# Altium PCB Motor Controller.PcbDoc (part 2 of 2)
Units mm, origin at the board's own origin, x right, y up, seen from the top; angles counter-clockwise.
Board outline 150 x 105 mm, 4 copper layers (Top Layer, Layer 1, Layer 2, Bottom Layer), stack 1.64 mm thick; 87 components, 29 nets, 264 pads, 470 vias.
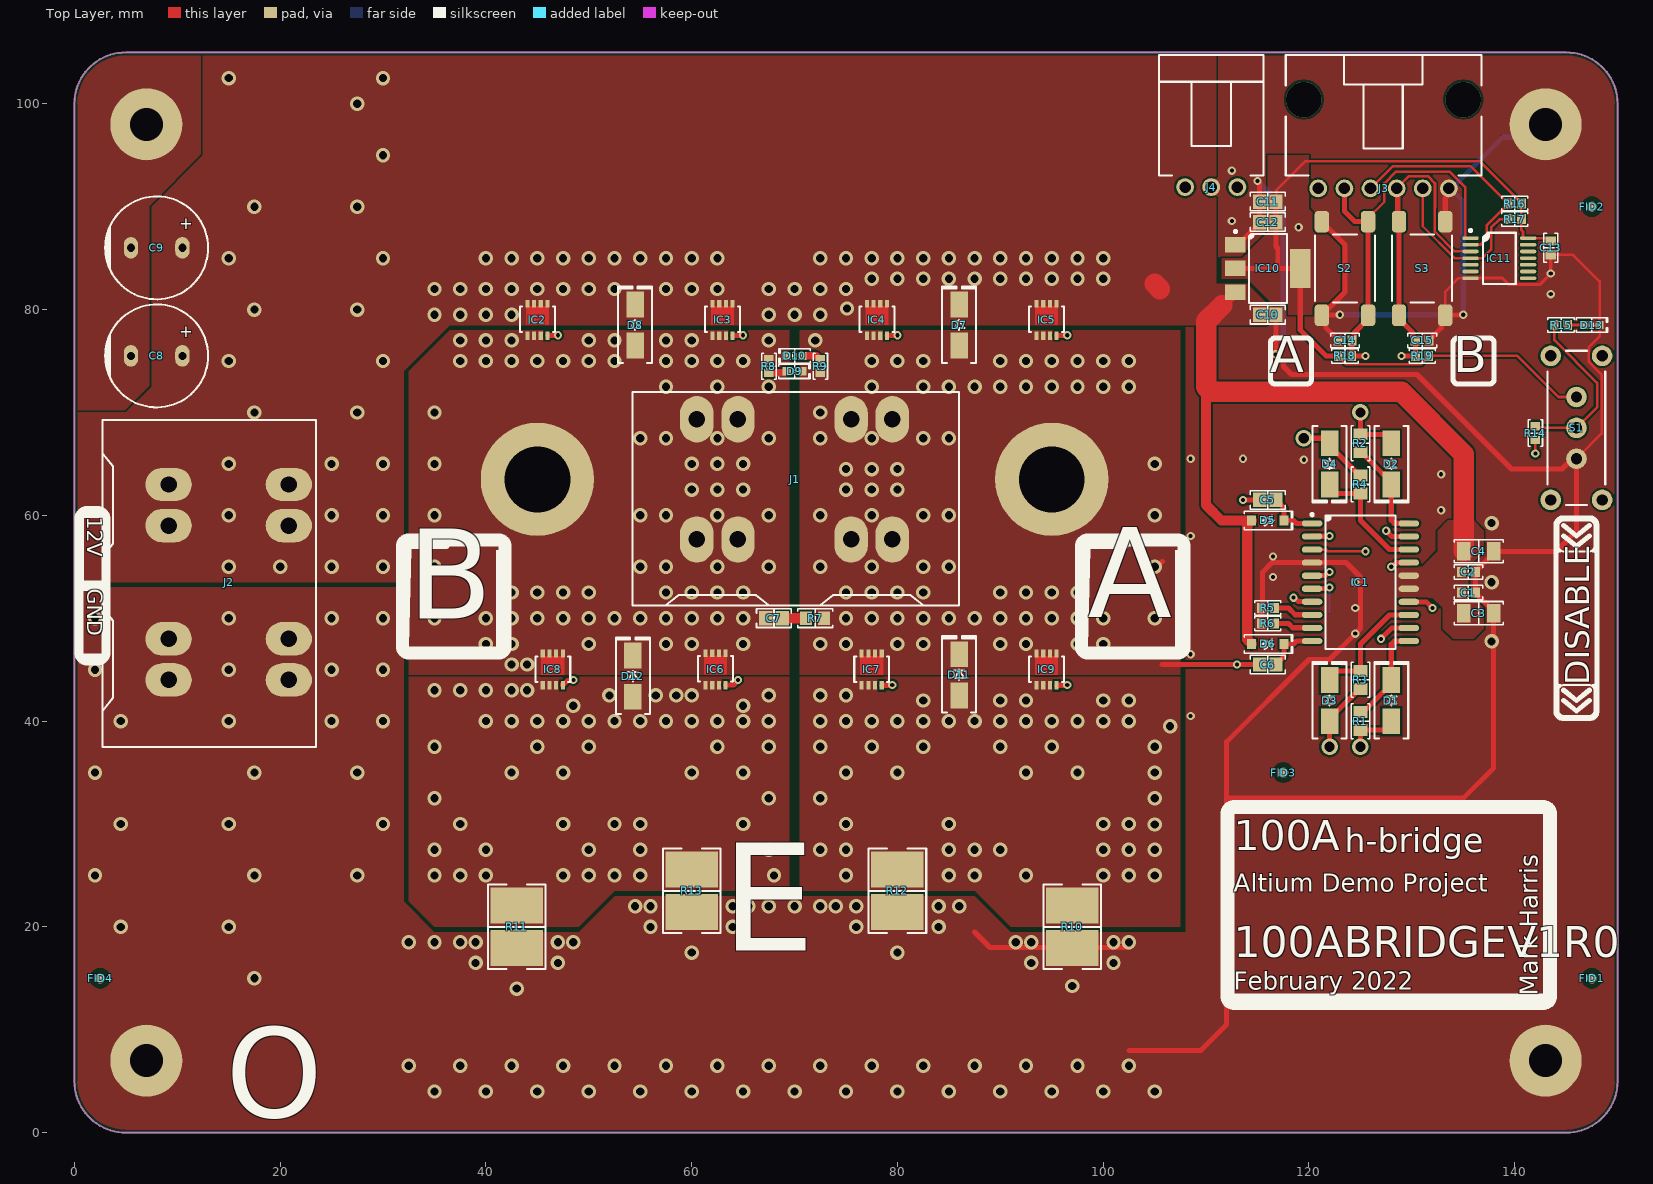
[diagram p0: Top Layer view]

## Via types
v1: diameter 1.4, hole 0.8, Top Layer to Bottom Layer, tented both sides, 420 vias
v2: diameter 0.8, hole 0.4, Top Layer to Bottom Layer, tented both sides, 44 vias
v3: diameter 1.6, hole 1, Top Layer to Bottom Layer, tented both sides, 4 vias
v4: diameter 3.45, hole 3.45, Top Layer to Bottom Layer, tented both sides, 2 vias

## Nets (pads, with @x,y where several pads share a name; then routed paths per layer and width w, separated by ;. In a path a pad name is that pad's centre, name@x,y a point inside that pad or via, vN(x,y) a via of type N, cw(c..) or ccw(c..) an arc to the next point about the centre after c; other vN are vias at no path point) (continued)
HIGHSRC_A: (continued)
  other v1: 72.5,47.5 75,47.5 80,47.5 82.5,47.5 90,47.5 92.5,47.5 97.5,47.5 100,47.5 75,50 77.5,50 80,50 82.5,50 85,50 87.5,50 90,50 92.5,50 95,50 97.5,50 100,50 105,50 75,52.5 77.5,52.5 80,52.5 82.5,52.5 90,52.5 92.5,52.5 95,52.5 97.5,52.5 72.5,55 77.5,55 82.5,55 85,55 72.5,60 77.5,60 82.5,60 85,60 105,60 75,62.5 77.5,62.5 80,62.5 75,64.5 77.5,64.5 80,64.5 105,65 72.5,67.5 77.5,67.5 82.5,67.5 85,67.5 72.5,70 77.5,72.5 82.5,72.5 85,72.5 87.5,72.5 90,72.5 92.5,72.5 95,72.5 97.5,72.5 100,72.5 102.5,72.5 77.5,75 80,75 82.5,75 90,75 92.5,75 95,75 97.5,75 100,75 102.5,75 72,77
HIGHSRC_B: C5.1 C7.2 D8.1 D10.2 D12.2 IC1.19 IC2.S IC3.S IC6.D IC8.D J1.1 pad.B R8.2 TP2.1 TP14.1 | length 78.5
  Top Layer w0.5: v2(113.6,61.5) C5.1 ; v2(127.5,58.5) 128.055,57.945 IC1.19
  Layer 1 w0.5: J1.1@64.5,69.34 64.5,68.715 67.215,66 88,66 92.5,70.5 109.5,70.5 112.75,67.25 112.75,62.35 v2(113.6,61.5) 124.5,61.5 v2(127.5,58.5)
  other v1: 42.5,45.5 44,45.5 40,47.5 42.5,47.5 50,47.5 57.5,47.5 60,47.5 65,47.5 35,50 40,50 42.5,50 45,50 47.5,50 50,50 52.5,50 55,50 57.5,50 60,50 62.5,50 65,50 42.5,52.5 45,52.5 47.5,52.5 50,52.5 57.5,52.5 60,52.5 62.5,52.5 65,52.5 35,55 55,55 57.5,55 62.5,55 67.5,55 35,60 55,60 57.5,60 62.5,60 67.5,60 60,62.5 62.5,62.5 65,62.5 35,65 60,65 62.5,65 65,65 55,67.5 57.5,67.5 62.5,67.5 67.5,67.5 35,70 57.5,72.5 62.5,72.5 67.5,72.5 37.5,75 40,75 42.5,75 45,75 47.5,75 50,75 52.5,75 57.5,75 60,75 62.5,75 65,75 37.5,77 40,77 42.5,77 50,77 52.5,77 57.5,77 60,77 67.5,77
LEDPWR: D13.1 R15.2 | length 1.6
  Top Layer w0.25: R15.2 D13.1
LOWIN_A: IC1.6 IC11.2 J3.3 R16.1 TP8.1 | length 70.8
  Top Layer w0.25: J3.3@126.23,91.777 126.23,92.027 128.153,93.95 135.7,93.95 139,90.65 139.05,90.65 139.35,90.35 R16.1 139.35,90.25 137.263,88.163 137.263,86.909 136.673,86.319 135.72,86.319 IC11.2
  Top Layer w0.5: IC1.6 120.319,52.884 121.803,52.884 121.919,53 v2(122,53)
  Layer 2 w0.5: v2(122,53) 121.15,53.85 121.15,55.65 130.5,65 130.5,87.507 J3.3@126.23,91.777
  Bottom Layer w0.2: TP8.1 v2(122,53)
LOWIN_B: IC1.5 IC11.4 J3.5 R17.1 TP13.1 | length 59.1
  Top Layer w0.25: J3.5 131.06,88.099 134.159,85 136.875,85 137.713,85.837 137.713,87.963 138.55,88.8 R17.1
  Top Layer w0.5: IC1.5 120.319,54.154 121.573,54.154 121.919,54.5 v2(122,54.5)
  Layer 2 w0.5: v2(122,54.5) 122,55.5 131.31,64.81 J3.5@131.31,91.777
LOWOUT_A: D3.2 IC1.13 R3.1 | length 12
  Top Layer w0.5: D3.2 122,44.275 122.6,44.875 R3.1 125,47.5 127.825,50.325 IC1.13
LOWOUT_B: D4.2 IC1.18 R4.1 | length 12
  Top Layer w0.5: D4.2 122,62.725 122.6,62.125 R4.1 125,59.5 127.825,56.675 IC1.18
LOWSRC_A: D11.1 IC1.14 IC7.S IC9.S J4.3 R10.1 R12.1 TP12.1 | length 92.9
  Top Layer w0.5: IC1.14 131.405,51.595 v2(132,51)
  Layer 1 w0.5: J4.3@113.04,91.777 121.25,83.567 121.25,76.75 132,66 v2(132,51)
  Layer 2 w0.5: v1(105,29.95) 121.198,29.95 132,40.752 v2(132,51)
  other v1: 75,25 85,25 87.5,25 92.5,25 100,25 102.5,25 105,25 72.5,27.5 75,27.5 85,27.5 87.5,27.5 90,27.5 100,27.5 102.5,27.5 105,27.5 75,30 85,30 100,30 102.5,30 72.5,32.5 105,32.5 75,35 80,35 92.5,35 97.5,35 105,35 72.5,37.5 77.5,37.5 82.5,37.5 90,37.5 95,37.5 105,37.5 106.5,39.5 72.5,40 75,40 77.5,40 80,40 82.5,40 85,40 87.5,40 90,40 92.5,40 95,40 97.5,40 100,40 102.5,40 82.5,42 90,42 92.5,42 100,42 102.5,42 72.5,42.5 75,42.5
LOWSRC_B: D12.1 IC1.17 IC6.S IC8.S J4.1 R11.2 R13.2 TP15.1 | length 133.9
  Top Layer w0.5: v2(128,55) 128.081,55 128.467,55.386 129.681,55.386 IC1.17
  Layer 1 w0.5: J4.1@107.96,91.777 111.987,87.75 116,87.75 120.55,83.2 120.55,76.45 129.25,67.75 129.25,56.25 v2(128,55)
  Layer 2 w0.75: v1(68,25) 68.031,25 69.306,23.725 88.028,23.725 95.578,31.275 103.028,31.275 103.078,31.225 121.306,31.225 128,37.919 v2(128,55)
  other v1: 35,25 37.5,25 40,25 47.5,25 50,25 52.5,25 55,25 65,25 35,27.5 40,27.5 50,27.5 55,27.5 65,27.5 67.5,27.5 37.5,30 47.5,30 52.5,30 55,30 65,30 35,32.5 67.5,32.5 42.5,35 47.5,35 60,35 65,35 35,37.5 45,37.5 50,37.5 62.5,37.5 67.5,37.5 40,40 42.5,40 45,40 47.5,40 50,40 52.5,40 55,40 57.5,40 60,40 62.5,40 65,40 67.5,40 48.5,41.5 65,41.5 52,42.5 56.5,42.5 58.5,42.5 60,42.5 67.5,42.5 35,43 37.5,43 40,43 42.5,43 44,43
NetC7_1: C7.1 R7.2 | length 2.3
  Top Layer w1: C7.1 R7.2
NetD9_1: D9.1 R8.1 | length 1.8
  Top Layer w0.75: R8.1 69.1,73.85 D9.1
NetD10_1: D10.1 R9.2 | length 1.9
  Top Layer w0.75: D10.1 72.1,75.5 72.45,75.15 R9.2
NetIC1_8: IC1.8 R5.2 | length 3.9
  Top Layer w0.5: R5.2 118,51 118.656,50.344 120.281,50.344 IC1.8
NetIC1_9: IC1.9 R6.2 | length 3.8
  Top Layer w0.5: R6.2 118,49.5 118.426,49.074 120.281,49.074 IC1.9
NetR14_1: R14.1 R15.1 S1.2 | length 16.6
  Top Layer w0.25: R14.1 142.15,68.5 S1.2 148,70.5 148,72.874 143.85,77.024 R15.1
pads on no net: FID1.F FID2.F FID3.F FID4.F IC11.5 IC11.6 IC11.8 IC11.9 IC11.10 IC11.11 IC11.12 IC11.13 S1.M
copper on no net:
  other v4: 119.5,100.417 135,100.417

## Polygon pours and split planes (outlines as drawn)
GND on Top Layer "NONET_L-01_P-001" (solid, remove dead copper, pour order 4): 32,53 0,53 0,0 115,0 115,19.5 91,19.5 87.5,23 52.5,23 49,19.5 35,19.5 32,22.5
GND on Top Layer "NONET_L-01_P-001" (solid, remove dead copper, pour order 19): 108,0 108,105 150,105 150,0
12V on Top Layer "NONET_L-01_P-001" (solid, remove dead copper, pour order 15): 128.5,55 128.5,52 132,52 133,51 133,49 134,48 136,48 137,49 137,51 135.5,52.5 135.5,55 137,56.5 137,58.5 136,59.5 133.5,59.5 132.5,58.5 132.5,56.5 131,55
3V3 on Top Layer "NONET_L-01_P-001" (solid, remove dead copper, pour order 14): 111.5,83 111.5,85 113.5,85 116,87.5 116,95 120,95 120,89.8 123.5,86.3 123.5,81.7 121.25,79.45 121.2,79.5 118,79.5 118,80.5 116.5,80.5 114,83
GND on Top Layer "NONET_L-01_P-001" (solid, remove dead copper, pour order 7): 0,105 12.5,105 12.5,95 7.5,90 7.5,72.5 5,70 0,70
12V on Top Layer "NONET_L-01_P-001" (solid, remove dead copper, pour order 5): 0,53.5 32,53.5 32,74 36.5,78.5 116,78.5 116,80.5 114,82.5 111,82.5 111,105 12.5,105 12.5,95 7.5,90 7.5,72.5 5,70 0,70
LOWSRC_B on Top Layer "NONET_L-01_P-001" (solid, remove dead copper, pour order 3): 32.5,44.5 32.5,22.5 35,20 49,20 52.5,23.5 69.5,23.5 69.5,44.5
LOWSRC_A on Top Layer "NONET_L-01_P-001" (solid, remove dead copper, pour order 2): 70.5,44.5 107.5,44.5 107.5,20 91,20 87.5,23.5 70.5,23.5
HIGHSRC_B on Top Layer "NONET_L-01_P-001" (solid, remove dead copper, pour order 1): 32.5,44.5 69.5,44.5 69.5,78 36.5,78 32.5,74
HIGHSRC_A on Top Layer "NONET_L-01_P-001" (solid, remove dead copper, pour order 0): 107.5,78 107.5,44.5 70.5,44.5 70.5,78
GND on Bottom Layer "NONET_L-01_P-001" (solid, remove dead copper, pour order 18): 108,105 108,0 150,0 150,105
GND on Bottom Layer "NONET_L-01_P-001" (solid, remove dead copper, pour order 13): 110.5,23 110.5,0 0,0 0,53 32,53 32,23
LOWSRC_B on Bottom Layer "NONET_L-01_P-001" (solid, remove dead copper, pour order 12): 69.5,44.5 69.5,23.5 32.5,23.5 32.5,44.5
LOWSRC_A on Bottom Layer "NONET_L-01_P-001" (solid, remove dead copper, pour order 11): 70.5,23.5 107.5,23.5 107.5,44.5 70.5,44.5
12V on Bottom Layer "NONET_L-01_P-001" (solid, remove dead copper, pour order 10): 107.5,78.5 107.5,105 12.5,105 12.5,95 7.5,90 7.5,72.5 5,70 5,56 7.5,53.5 32,53.5 32,78.5
HIGHSRC_A on Bottom Layer "NONET_L-01_P-001" (solid, remove dead copper, pour order 9): 107.5,78 70.5,78 70.5,44.5 107.5,44.5
HIGHSRC_B on Bottom Layer "NONET_L-01_P-001" (solid, remove dead copper, pour order 8): 32.5,78 69.5,78 69.5,44.5 32.5,44.5
GND on Bottom Layer "NONET_L-01_P-001" (solid, remove dead copper, pour order 6): 32,53 32,37.5 0,37.5 0,105 12.5,105 12.5,95 7.5,90 7.5,72.5 5,70 5,56 8,53
GND on Layer 1 "NONET_L-01_P-001" (solid, remove dead copper, pour order 16): 0,105 0,0 150,0 150,105
GND on Layer 2 "NONET_L-01_P-001" (solid, remove dead copper, pour order 17): 0,0 0,105 150,105 150,0

## Keep-outs
Keep-Out Layer:
  the board outline again, w0.2

## Silkscreen, mask and mechanical layers (free items; w line width, h text height)
Top Overlay:
  drawing of 97 lines, arcs and shapes, not listed
  text "A" at 116.25,72.75 h6
  text "B" at 134,72.75 h6
  text "12V" at 0.753,59.852 h2.5 r270
  text "GND" at 0.753,52.852 h2.5 r270
  text "A" at 98.5,47.25 h15
  text "B" at 32.398,47.071 h15
  text "DISABLE" at 148,43.5 h4 r90
  text "100A" at 112.7,26.5 h5
  text "h-bridge" at 123.5,26.5 h4
  text "Altium Demo Project" at 112.7,22.833 h3
  text "100ABRIDGEV1R0" at 112.7,17.05 h3
  text "E" at 62.944,14.238 h18
  text "February 2022" at 112.7,13.3 h3
  text "Mark Harris" at 142.8,13.3 h3 r90
  text "O" at 14.732,-1.347 h15
Bottom Overlay:
  text "CSENS_A / GND / CSENS_B" at 103.08,93.25 h3 r270
  text "GND / LOW_B / HIGH_B / LOW_A / HIGH_A / EN" at 117.356,93.25 h3 r270

## Text inside footprints (layer, text, board x,y; h text height)
C8: Top Overlay "+" at 10.2,76.9 h2
C9: Top Overlay "+" at 10.2,87.4 h2